# Altium PCB MI_06_07_08_MCU_Rev_4_0.PcbDoc
Units mm, origin at the board's own origin, x right, y up, seen from the top; angles counter-clockwise.
Board outline 79 x 66.2 mm, 2 copper layers (Top Layer, Bottom Layer), stack 1.671 mm thick; 93 components, 57 nets, 287 pads, 110 vias.
Unrouted connection lines stored in the file: 5.
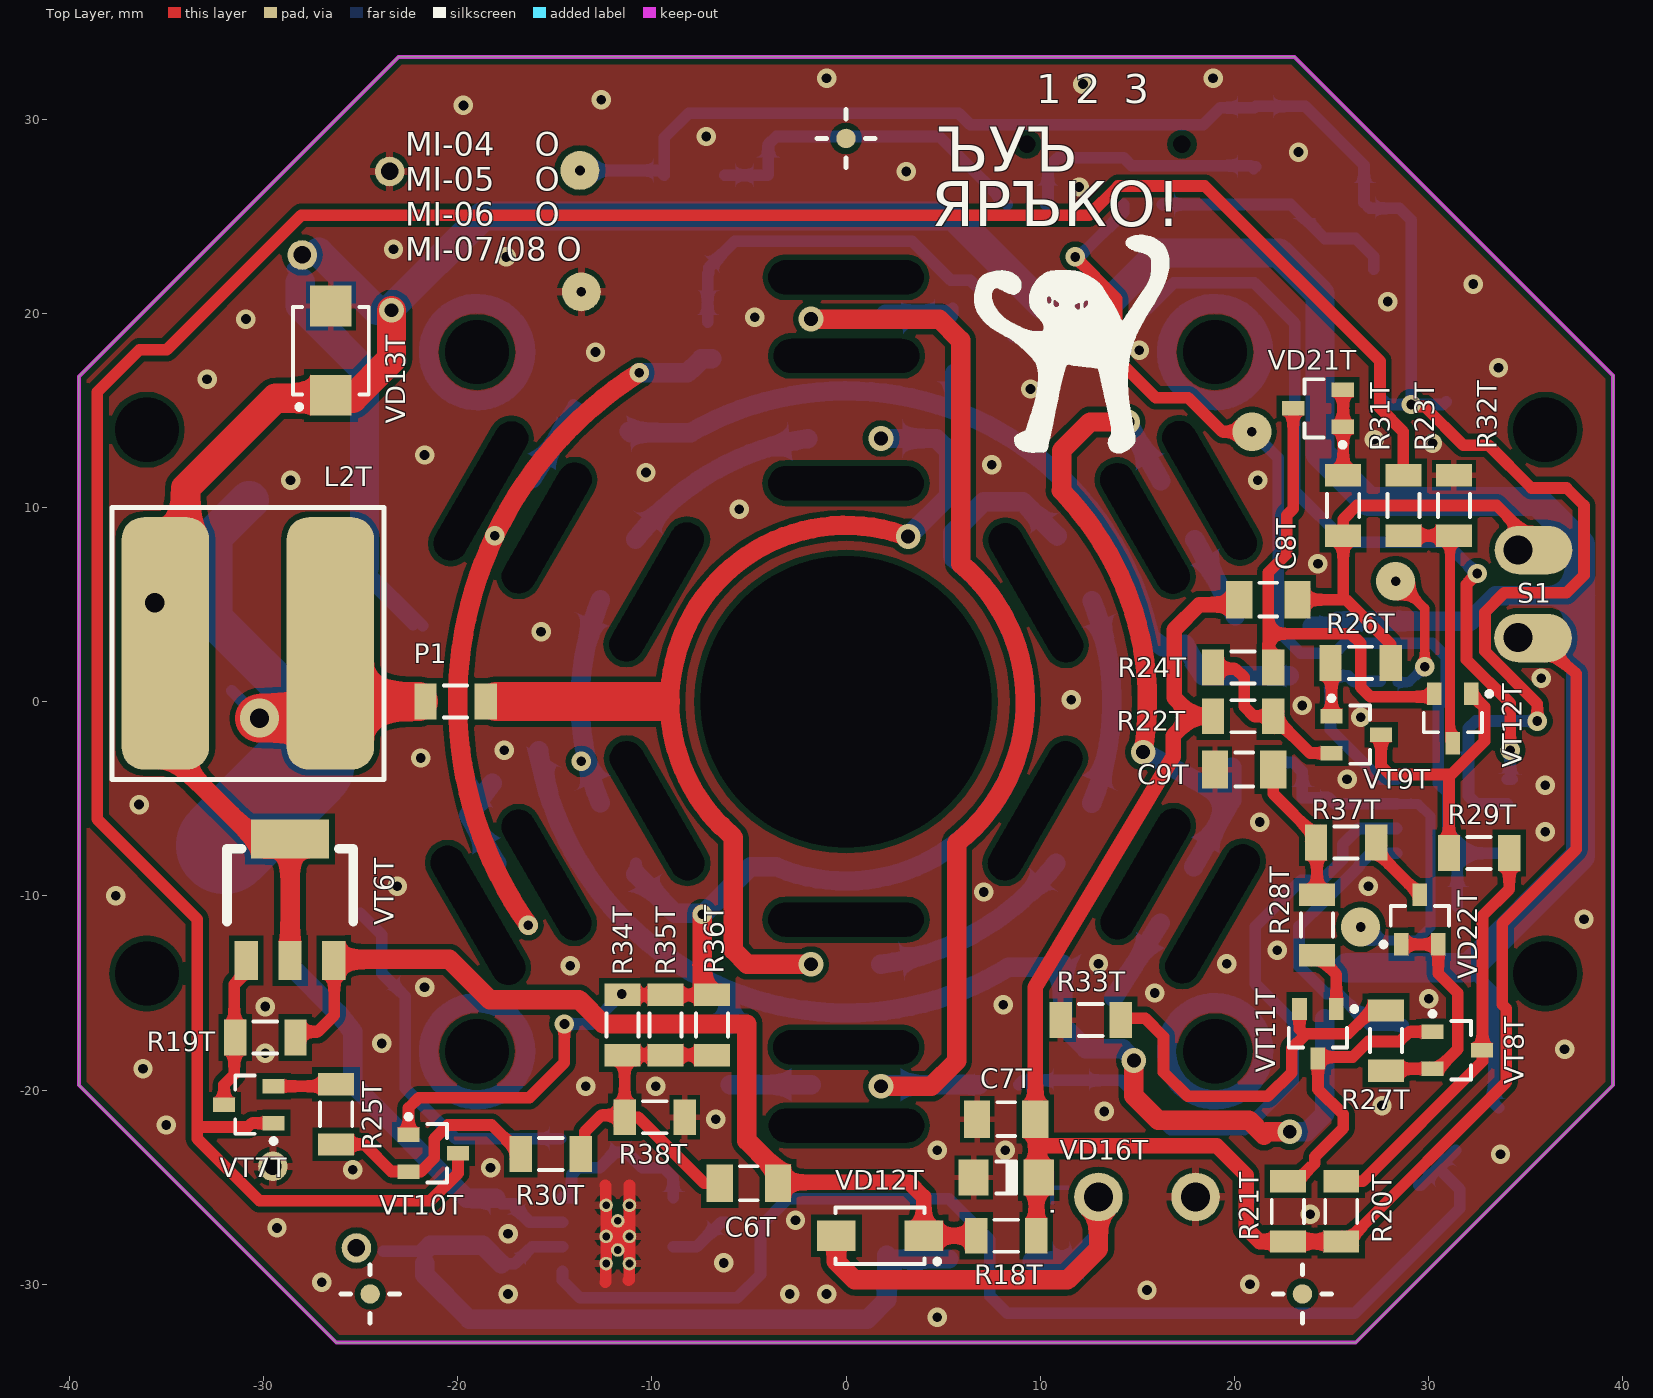
[diagram p0: Top Layer view]
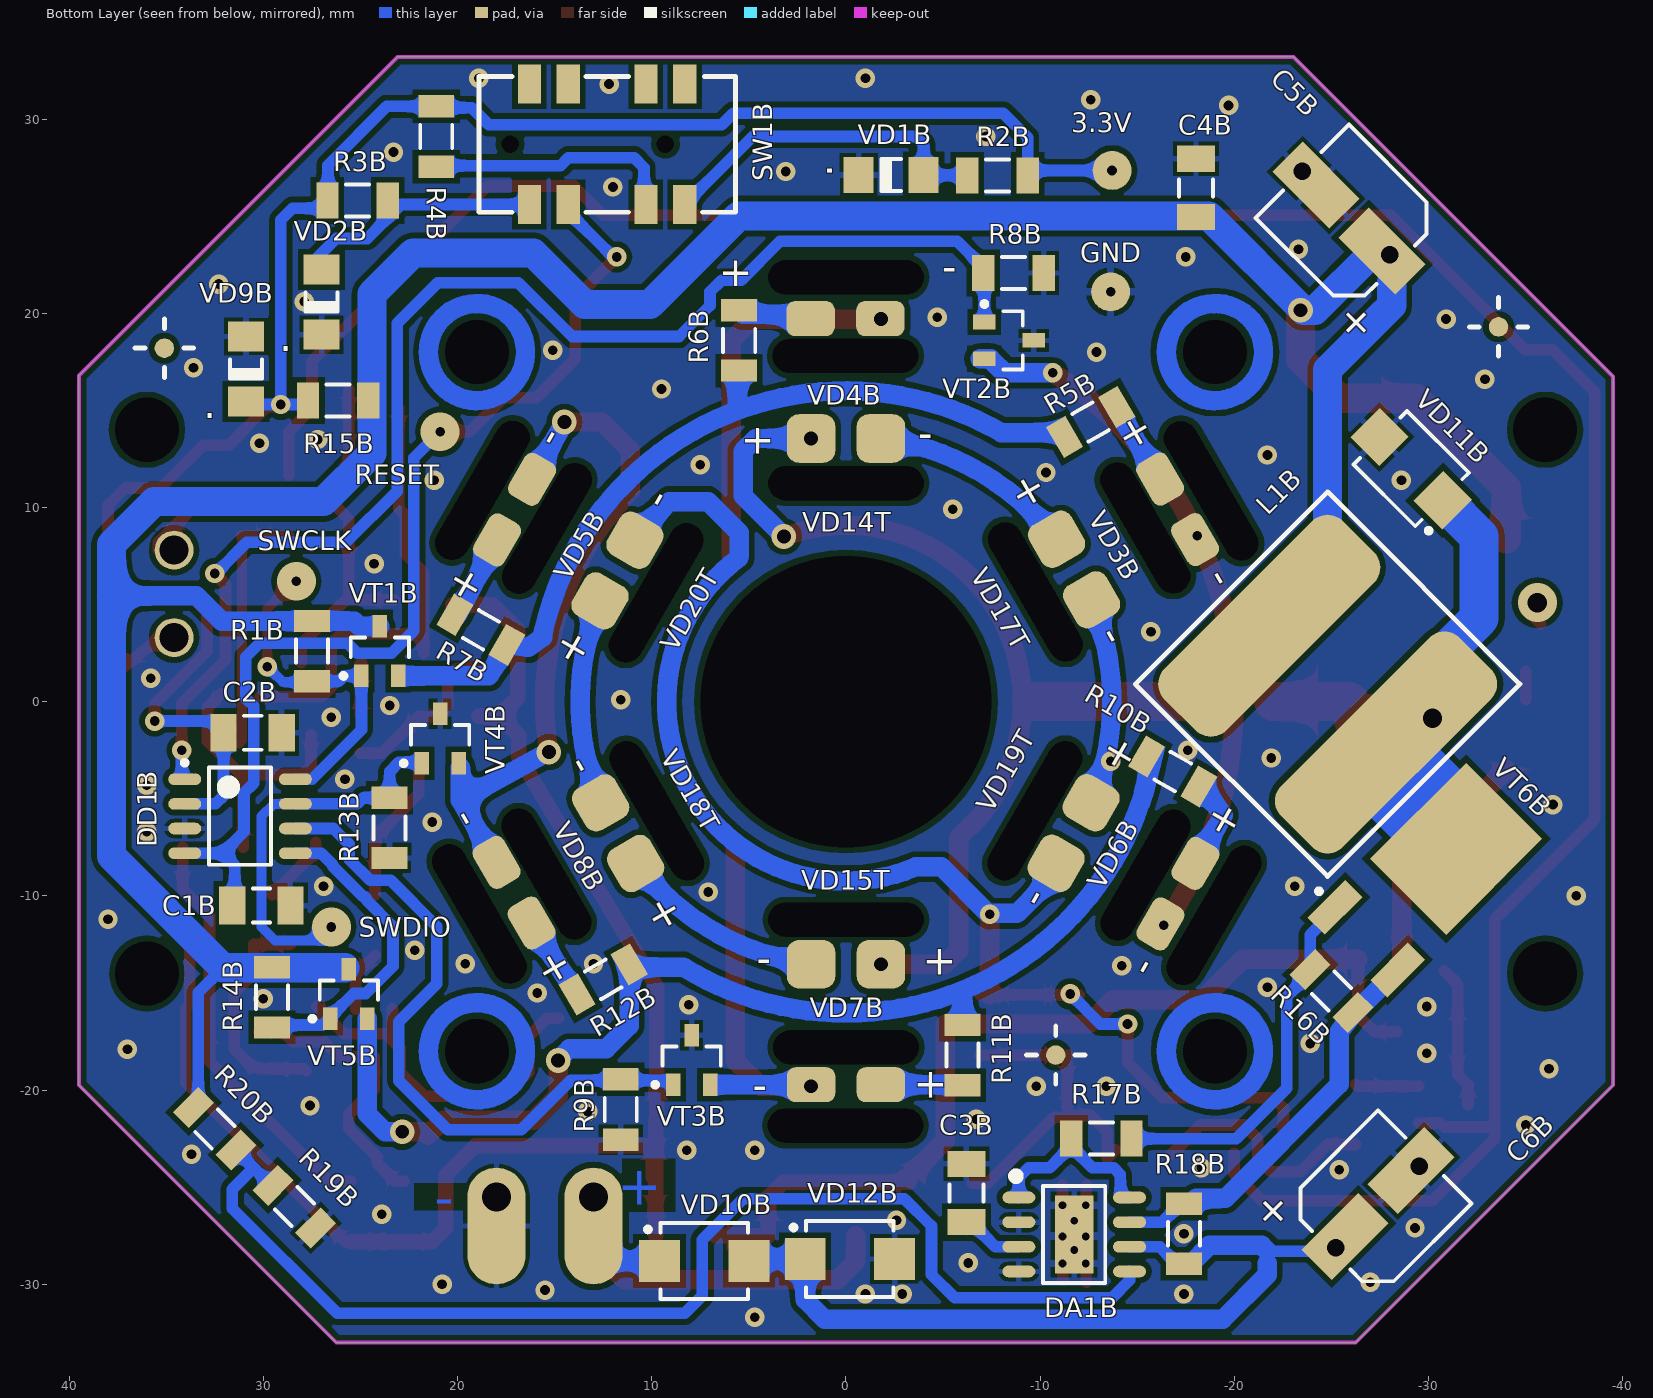
[diagram p1: Bottom Layer view, seen from below]
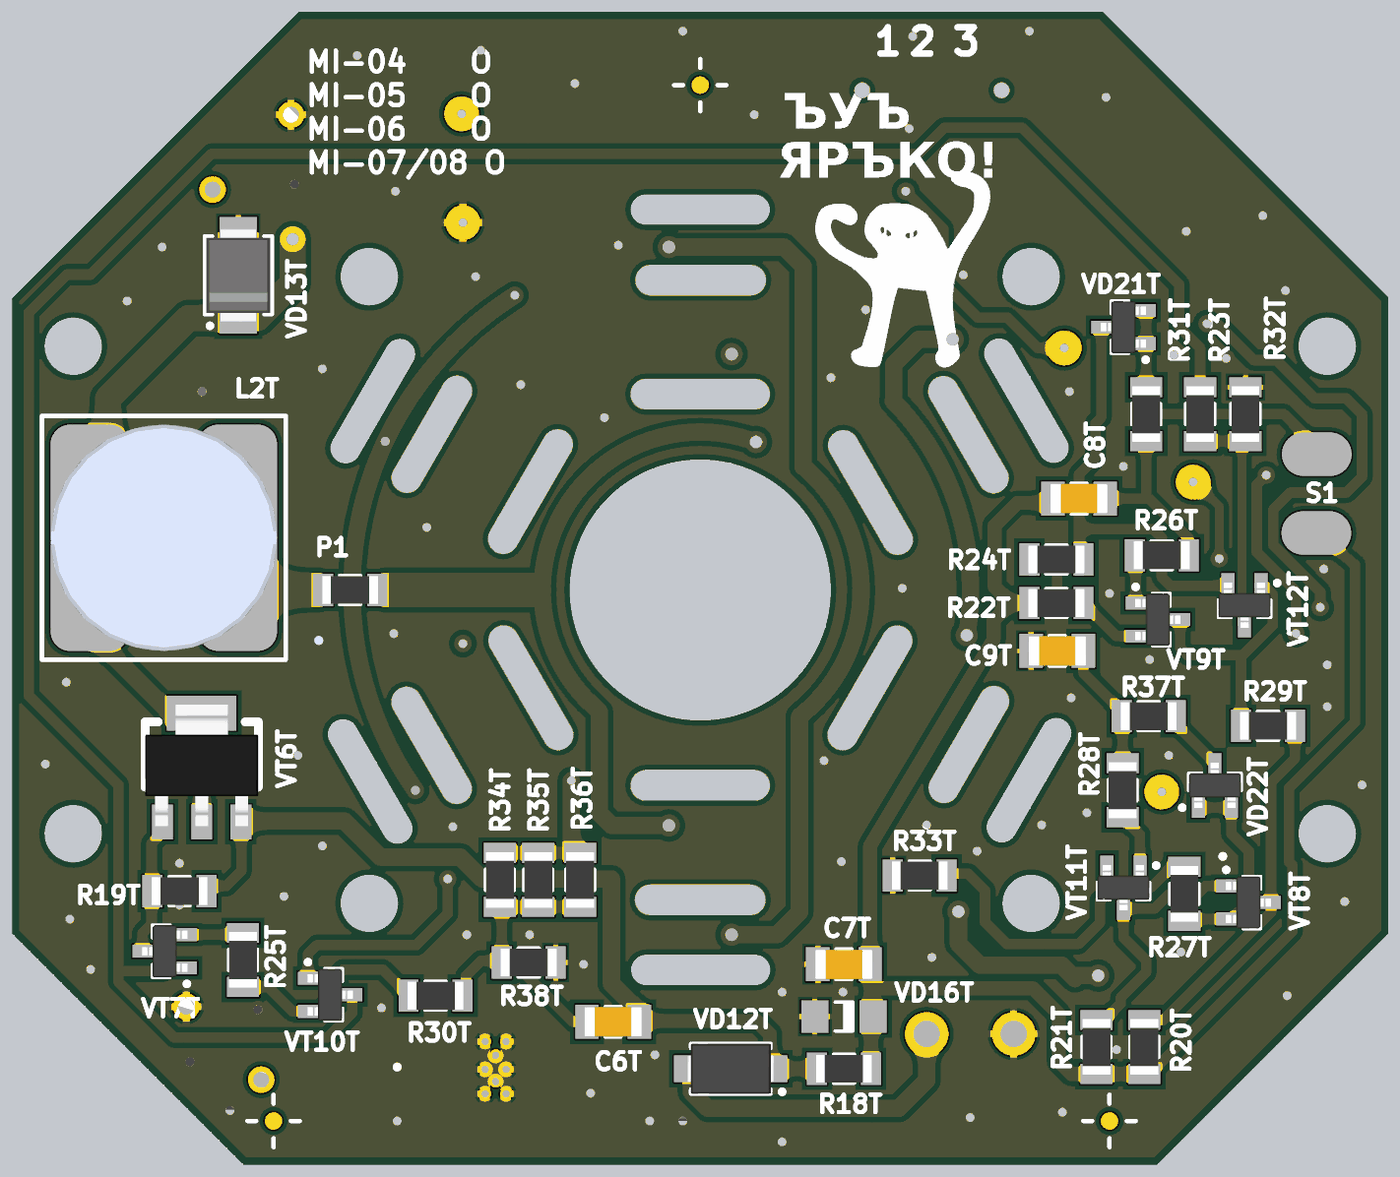
[diagram p2: 3D render of the assembled board from above, using the file's embedded part models]
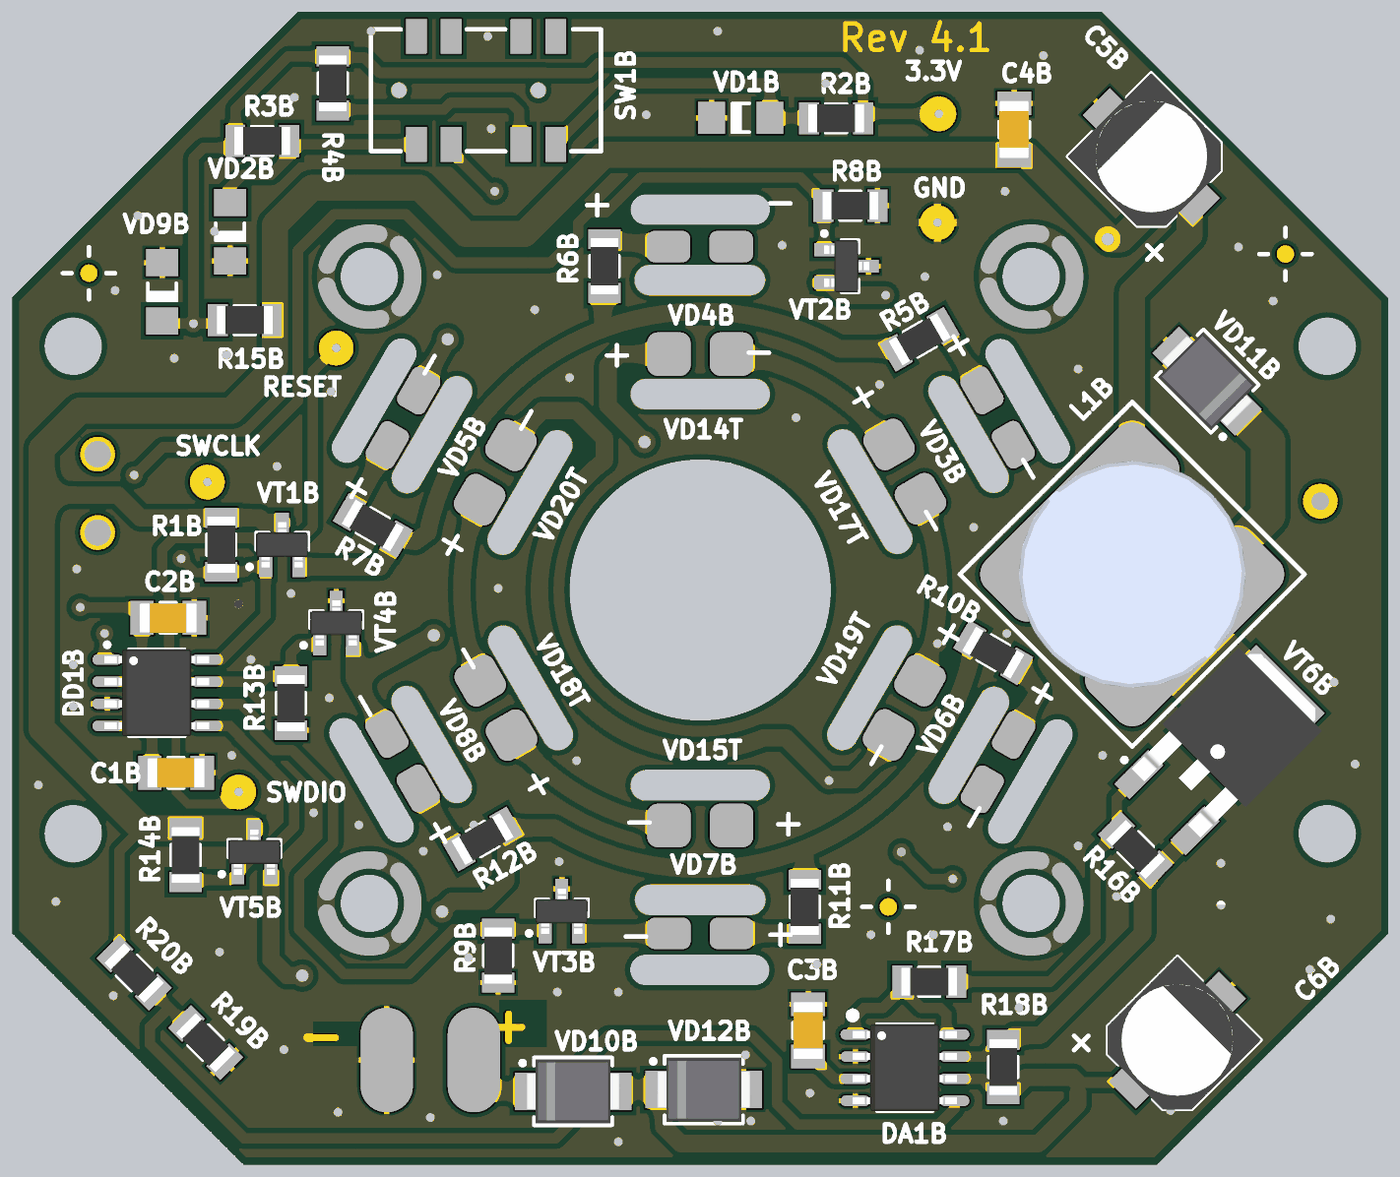
[diagram p3: 3D render of the assembled board from below, using the file's embedded part models]

## Layer stack, top to bottom
Top Solder: solder mask 0.0102, Solder Resist, Dk 3.5
Top Layer: signal copper 0.0356
Dielectric 1: dielectric 1.6, FR-4, Dk 4.8
Bottom Layer: signal copper 0.0356
Bottom Solder: solder mask 0.0102, Solder Resist, Dk 3.5

## Board outline
-39.5,-19.75 -39.5,16.75 -23.05,33.2 23.1,33.2 39.5,16.8 39.5,-19.75 26.25,-33 -26.25,-33

## Design rules (kind name [scope] priority, off if disabled: settings)
Clearance [All] p1: gap=0.254 ignorepadtopadclearanceinfootprint=FALSE except(0: Arc-Hole Track-Hole SMDPad-Hole THPad-Hole Via-Hole Fill-Hole Poly-Hole Region-Hole Text-Hole; 0.1: Arc-SMDPad Track-SMDPad SMDPad-SMDPad SMDPad-THPad SMDPad-Via SMDPad-Fill SMDPad-Region SMDPad-Text THPad-THPad THPad-Via THPad-Fill THPad-Region THPad-Text; 0.3: Arc-Poly Track-Poly SMDPad-Poly THPad-Poly Via-Poly Fill-Poly Poly-Poly Poly-Region Poly-Text)
ComponentClearance [All] p1: gap=-20 collisioncheckmode=3 verticalgap=0.254 showdistances=FALSE
PolygonConnect [All] p1: thpad.connectstyle=Relief thpad.reliefconductorwidth=0.4 thpad.reliefentries=4 thpad.polygonreliefangle="90 Angle" thpad.airgapwidth=0.254 smdpad.connectstyle=Relief smdpad.reliefconductorwidth=0.3 smdpad.reliefentries=4 smdpad.polygonreliefangle="90 Angle" smdpad.airgapwidth=0.2 via.connectstyle=Direct via.reliefconductorwidth=0.254 via.reliefentries=4 via.polygonreliefangle="90 Angle" via.airgapwidth=0.254
RoutingVias [All] p1: holewidth=0.711 width=1.27 viastyle="Through Hole" minholewidth=0.711 minwidth=1.27 maxholewidth=0.711 maxwidth=1.27
SolderMaskExpansion [All] p1: expansion=0.102
Width [All] p1: maxlimit=5 minlimit=0.3 preferedwidth=0.6
29 further rules are at their usual default settings.

## Classes and differential pairs
component class MI_04_05_Rev_2_0: C6T C7T C8T C9T L2T R18T R19T R20T R21T R22T R23T R24T R25T R26T R27T R28T R29T R30T R31T R32T R33T R34T R35T R36T R37T R38T VD12T VD13T VD14T VD15T VD16T VD17T VD18T VD19T VD20T VD21T VD22T VT6T VT7T VT8T VT9T VT10T VT11T VT12T
component class MI_06_07_08_MCU_Rev_3_0: C1B C2B C3B C4B C5B C6B DA1B DD1B DD1T L1B R1B R2B R3B R4B R5B R6B R7B R8B R9B R10B R11B R12B R13B R14B R15B R16B R17B R18B R19B R20B SW1B SW1T VD1B VD2B VD3B VD4B VD5B VD6B VD7B VD8B VD9B VD9T VD10B VD11B VD12B VT1B VT2B VT3B VT4B VT5B VT6B

## Components (designator, comment, footprint, x,y, rotation, side; value= is the part's Value field where it differs from the comment)
C1B "Capacitor" CAP1206 30.1,-10.5 r180 bottom value="0.1 uF"
C2B "Capacitor" CAP1206 30.55,-1.6 r0 bottom value="0.1 uF"
C3B "Capacitor" CAP1206 -6.2,-25.3 r90 bottom value="0.01 uF"
C4B "Capacitor" CAP1206 -18.025,26.45 r90 bottom value="0.1 uF"
C5B "Capacitor_Polar" CAP6.3x7.7 -25.9,24.9 r45 bottom value="470 uF 10V"
C6B "Capacitor_Polar" CAP6.3x7.7 -27.391,-25.848 r135 bottom value="100 uF 50V"
C6T "Capacitor" CAP1206 -5,-24.8 r0 top value="0.1 uF"
C7T "Capacitor" CAP1206 8.25,-21.5 r0 top value="0.22 uF"
C8T "Capacitor" CAP1206 21.75,5.25 r180 top value="0.22 uF"
C9T "Capacitor" CAP1206 20.5,-3.5 r0 top value="2.2 uF"
DA1B "MC34063" SOIC-8-EPad -11.75,-27.435 r180 bottom
DD1B "STM32G030J6" SOIC-8 31.2,-5.9 r180 bottom
L1B "coil" SDR1307 -24.8,0.9 r225 bottom value=SDR1307-680KL
L2T "coil" SDR1307 -30.8,3 r180 top value=SDR1307-101KL
P1 "Comment" RES1206 -20.1,0 r0 top
R1B "Resistor" RES1206 27.5,2.6 r90 bottom value="10 kOm"
R2B "Resistor" RES1206 -7.8,27.1 r0 bottom value="10 kOm"
R3B "Resistor" RES1206 25.15,25.8 r180 bottom value="10 kOm"
R4B "Resistor" RES1206 21.1,29.1 r270 bottom value="10 kOm"
R5B "Resistor" RES1206 -12.6,14.4 r150 bottom value="5.1 Om"
R6B "Resistor" RES1206 5.5,18.6 r90 bottom value="5.1 Om"
R7B "Resistor" RES1206 18.8,3.7 r30 bottom value="5.1 Om"
R8B "Resistor" RES1206 -8.625,22.075 r180 bottom value="10 kOm"
R9B "Resistor" RES1206 11.6,-21 r270 bottom value="10 kOm"
R10B "Resistor" RES1206 -16.825,-3.6 r30 bottom value="5.1 Om"
R11B "Resistor" RES1206 -6,-18.2 r90 bottom value="5.1 Om"
R12B "Resistor" RES1206 12.5,-14.3 r150 bottom value="5.1 Om"
R13B "Resistor" RES1206 23.5,-6.5 r270 bottom value="10 kOm"
R14B "Resistor" RES1206 29.55,-15.225 r90 bottom value="10 kOm"
R15B "Resistor" RES1206 26.15,15.5 r180 bottom value="xxx kOm"
R16B "Resistor" RES1206 -25,-14.9 r45 bottom value="xxx kOm"
R17B "Resistor" RES1206 -13.15,-22.5 r0 bottom value="xxx kOm"
R18B "Resistor" RES1206 -17.4,-27.4 r270 bottom value="xxx kOm"
R18T "Resistor" RES1206 8.25,-27.5 r180 top value="1.8 kOm"
R19B "Resistor" RES1206 28.4,-26 r225 bottom value="xxx kOm"
R19T "Resistor" RES1206 -29.9,-17.3 r180 top value="120 Om"
R20B "Resistor" RES1206 32.5,-22 r45 bottom value="xxx kOm"
R20T "Resistor" RES1206 25.5,-26.25 r90 top value="47 kOm"
R21T "Resistor" RES1206 22.75,-26.25 r90 top value="180 kOm"
R22T "Resistor" RES1206 20.45,-0.75 r0 top value="10 kOm"
R23T "Resistor" RES1206 28.7,10.1 r90 top value="10 kOm"
R24T "Resistor" RES1206 20.45,1.75 r0 top value="5.1 kOm"
R25T "Resistor" RES1206 -26.25,-21.25 r90 top value="240 Om"
R26T "Resistor" RES1206 26.5,2 r0 top value="47 kOm"
R27T "Resistor" RES1206 27.8,-17.45 r90 top value="5.1 kOm"
R28T "Resistor" RES1206 24.25,-11.5 r90 top value="47 kOm"
R29T "Resistor" RES1206 32.6,-7.8 r0 top value="180 kOm"
R30T "Resistor" RES1206 -15.2,-23.3 r180 top value="10 Om"
R31T "Resistor" RES1206 25.6,10.1 r90 top value="180 kOm"
R32T "Resistor" RES1206 31.3,10.1 r90 top value="47 kOm"
R33T "Resistor" RES1206 12.6,-16.4 r180 top value="10 kOm"
R34T "Resistor" RES1206 -11.5,-16.65 r90 top value="3 Om"
R35T "Resistor" RES1206 -9.3,-16.65 r90 top value="3 Om"
R36T "Resistor" RES1206 -6.9,-16.65 r90 top value="3 Om"
R37T "Resistor" RES1206 25.75,-7.25 r0 top value="180 kOm"
R38T "Resistor" RES1206 -9.85,-21.4 r180 top value="1 Om"
SW1B "mks13c02" ? 12.3,28.7 r0 bottom value=K3-2346S-K1
VD1B "Zenner" minimelf -2.325,27.125 r180 bottom value="TZS4678-GS08 1.8V"
VD2B "Zenner" minimelf 27,20.575 r90 bottom value=BZV55-C2V4
VD3B "LED" LED_MAJAK2 -15.408,8.941 r60 bottom
VD4B "LED" LED_MAJAK2 0.025,17.8 r0 bottom
VD5B "LED" LED_MAJAK2 15.4,8.925 r300 bottom
VD6B "LED" LED_MAJAK2 -15.425,-8.925 r120 bottom
VD7B "LED" LED_MAJAK2 0,-17.8 r180 bottom
VD8B "LED" LED_MAJAK2 15.425,-8.875 r240 bottom
VD9B "Zenner" minimelf 30.9,17.125 r90 bottom value=BZV55-C3V3
VD10B "Diode" SMB1 7.3,-28.8 r180 bottom value=SS210
VD11B "Schottky" SMB1 -29.1,12 r45 bottom value=SS210
VD12B "Suppressor" SMB1 -0.2,-28.7 r180 bottom value=SMBJ40CA-TR
VD12T "Diode" SMA-F 1.75,-27.5 r180 top value=S1M
VD13T "Schottky" SMB1 -26.525,18.075 r90 top value=SS210
VD14T "LED" LED_MAJAK 0,11.25 r0 bottom
VD15T "LED" LED_MAJAK 0,-11.225 r180 bottom
VD16T "Zenner" minimelf 8.25,-24.5 r180 top value=BZV55-C12V
VD17T "LED" LED_MAJAK -9.75,5.65 r60 bottom
VD18T "LED" LED_MAJAK 9.743,-5.625 r240 bottom
VD19T "LED" LED_MAJAK -9.725,-5.615 r120 bottom
VD20T "LED" LED_MAJAK 9.775,5.6 r300 bottom
VD21T "Diode" "SOT 23" 24.3,15.1 r180 top value=BAT54C
VD22T "Diode" "SOT 23" 29.55,-11.225 r90 top value=BAT54C
VT1B "MOSFET-P" "SOT 23" 24,2.6 r90 bottom value=IRLML2244TRPBF
VT2B "MOSFET-N" "SOT 23" -8.4,18.6 r180 bottom value=IRLML6244TRPBF
VT3B "MOSFET-N" "SOT 23" 7.95,-18.45 r90 bottom value=IRLML6244TRPBF
VT4B "MOSFET-N" "SOT 23" 20.9,-1.9 r90 bottom value=IRLML6244TRPBF
VT5B "MOSFET-P" "SOT 23" 25.6,-15.05 r90 bottom value=IRLML2244TRPBF
VT6B "MOSFET-P" "D PAK" -29.8,-9.2 r135 bottom value=FR9024N
VT6T "PNP" SOT223 -28.525,-11.775 r0 top value=BCP53
VT7T "NPN" "SOT 23" -30.75,-20.75 r180 top value=MMBTA42
VT8T "NPN" "SOT 23" 31.475,-17.95 r0 top value=BC847C
VT9T "PNP" "SOT 23" 26.275,-1.7 r0 top value=BC857C
VT10T "NPN" "SOT 23" -21.25,-23.25 r0 top value=BC847C
VT11T "NPN" "SOT 23" 24.3,-17.1 r270 top value=BC847C
VT12T "PNP" "SOT 23" 31.25,-0.875 r270 top value=BC857C

## Footprints (in the part's own frame and the unit in brackets; to place one, negate y for a bottom-side part, rotate by r counter-clockwise, add the part's x,y. Pads: shape width x height; smd on the part's side, far side on the other; paste and mask are expansions set on the pad)
CAP6.3x7.7 [mm]
  rect 4.15x2.2 smd: 1(-2.4,0) 2(2.4,0)
  silkscreen extent -3.4,-3.4 3.4,3.4, body extent -3.6,-3.4 3.6,3.4, height 7.7
CAP1206 [mm]
  rect 1.35x1.95 smd: 1(-1.5,0) 2(1.5,0)
  silkscreen extent -0.45,-0.87 0.45,0.87, body extent -1.65,-0.85 1.65,0.85, height 1.5
"D PAK" [mm]
  rect 2.75x1.25 smd: 1(-4.25,2.28) 3(-4.25,-2.28)
  rect 7x5.55 smd: 2(2.286,0)
  silkscreen extent -4.37,3.33 -4.13,3.58, body extent -4.31,-3.38 5.61,3.37, height 2.4
LED_MAJAK [mm]
  round 0 hole 1.75 slot 8 at 0 deg: 0(0,0)
  rrect50% 2.5x2.5 smd: 1(-1.8,-2.3) 2(1.8,-2.3)
LED_MAJAK2 [mm]
  round 0 hole 1.75 slot 7.5 at 0 deg: 0(0,0)
  rrect50% 2.5x1.8 smd: 1(-1.8,-1.925) 2(1.8,-1.925)
minimelf [mm] "MELF Diode, 2-Leads, Body 3,50x1,65mm, IPC Medium Density"
  rect 1.55x1.85 smd: 1(-1.675,0) 2(1.675,0)
  silkscreen extent -0.5,-0.83 0.5,0.83, body extent -1.85,-0.85 1.85,0.85, height 1.69
RES1206 [mm] "Chip Resistor, 2-Leads, Body 3,20x1,60mm, IPC Medium Density"
  rect 1.15x1.85 smd: 1(-1.55,0) 2(1.55,0)
  silkscreen extent -0.6,-0.82 0.6,0.82, body extent -1.6,-0.8 1.6,0.8, height 0.6
SDR1307 [mm]
  rrect50% 4.5x13 smd: 1(4.25,0) 2(-4.25,0)
  silkscreen extent -7,-7 7,7, body extent -6.5,-6.5 6.5,6.5, height 7
SMA-F [mm] "Molded Diode, 2-Leads, Body 4,30x2,70mm, IPC Medium Density"
  rect 2x1.55 smd: 1(-2.25,0) 2(2.25,0)
  silkscreen extent -3.08,-1.45 2.3,1.45, body extent -2.52,-1.45 2.52,1.45, height 2.4
SMB1 [mm] "Molded Diode, 2-Leads, Body 4,25x3,60mm, IPC Medium Density"
  rect 2.1x2.15 smd: 1(-2.3,0) 2(2.3,0)
  silkscreen extent -3.03,-1.95 2.25,1.95, body extent -2.7,-1.8 2.7,1.8, height 2.3
SOIC-8 [mm] "SOIC, 8-Leads, Body 4,90x3,90mm, Pitch 1,27mm, IPC Medium Density"
  oval 1.7x0.6 smd: 1(-2.85,1.905) 2(-2.85,0.635) 3(-2.85,-0.635) 4(-2.85,-1.905) 5(2.85,-1.905) 6(2.85,-0.635) 7(2.85,0.635) 8(2.85,1.905)
  silkscreen extent -2.98,-2.5 1.6,2.88, body extent -3,-2.5 3,2.5, height 1.75
SOIC-8-EPad [mm] "SOIC, 8-Leads, Body 4,90x3,90mm, Pitch 1,27mm, IPC Medium Density"
  round 0.7 hole 0.4: 0(-0.6,1.5) 0(-0.6,-0.1) 0(-0.6,-1.5) 0(0,-0.8) 0(0,0.7) 0(0.6,-1.5) 0(0.6,1.5) 0(0.6,-0.1)
  rect 2x4 smd: 0(0,0)
  oval 1.7x0.6 smd: 1(-2.85,1.905) 2(-2.85,0.635) 3(-2.85,-0.635) 4(-2.85,-1.905) 5(2.85,-1.905) 6(2.85,-0.635) 7(2.85,0.635) 8(2.85,1.905)
  silkscreen extent -3.2,-2.5 1.6,3.2, body extent -3,-2.5 3,2.5, height 1.75
SOT223 [mm]
  rect 1.2x2 smd: 1(-2.35,-1.55) 2(-0.1,-1.55) 3(2.15,-1.55)
  rect 4x2 smd: 2(-0.1,4.7)
  silkscreen extent -3.35,0.45 3.15,4.2, body extent -3.35,-1.78 3.15,5.18, height 1.7
"SOT 23" [mm] "SOT23, 3-Leads, Body 2,90x2,45mm, Pitch 0,95mm, IPC Medium Density"
  rect 1.15x0.75 smd: 1(-1.275,0.95) 2(-1.275,-0.95) 3(1.275,0)
  silkscreen extent -1.4,-1.5 0.7,2, body extent -1.3,-1.5 1.3,1.5, height 1.1
? [mm]
  round 0 hole 0.9: 0(-3,0) 0(5,0)
  rect 1.2x2 smd: 1(-4,-3.1) 1(-4,3.1) 2(-2,-3.1) 2(-2,3.1) 3(2,-3.1) 3(2,3.1) 4(4,-3.1) 4(4,3.1)
  silkscreen extent -6.6,-3.5 6.6,3.5, body extent -6.5,-3.45 6.5,3.45, height 3.5

## Free pads (board coordinates)
  round 0 / inner round 3.3 / far side round 0 hole 3.3 unplated mask-25.4: 0(-36,-14) 0(-36,14) 0(-19,-18) 0(-19,18) 0(19,-18) 0(19,18) 0(36,-14) 0(36,14)
  round 0 hole 1.75 slot 8 at 120 deg unplated mask-25.4: 0(-18.95,-11) 0(18.725,10.875)
  round 0 hole 1.75 slot 8 at 60 deg unplated mask-25.4: 0(-18.8,10.85) 0(18.875,-10.925)
  round 0 hole 15 unplated: 0(0,0)
  round 0 hole 1.75 slot 8 at 0 deg unplated mask-25.4: 0(0,21.85) 0(0.025,-21.825)
  round 0.025 on Mech13: 1(189.769,192.414) 1(189.769,192.414) 1(189.769,192.414) 1(191.513,192.692) 1(191.513,192.692) 1(191.513,192.692) 1(191.547,192.414) 1(191.547,192.414) 1(191.547,192.414)
  oval 3x6 smd far side: 2(13,-27) 2(18,-27)
  oval 4x2.5 smd: 2(35.375,3.275) 3(35.4,7.8)
  round 2.5 hole 1.5: 6(13,-25.5) 7(18,-25.5)
  round 2 hole 1.5: 8(34.6,3.3) 9(34.6,7.8)
  round 2 hole 0.5: 10(-13.7,27.35) 10(-13.625,21.1)
  round 1 smd far side paste-3: 11(-33.6,19.3) 11(-10.8,-18.2) 11(35.1,18.2)
  round 1 smd paste-3: 11(-24.5,-30.5) 11(0,29) 11(23.5,-30.5)
  round 1.524 hole 0.9: 12(-23.5,27.3) 13(-29.508,-23.931) 13(-28,23) 13(-25.208,-28.131)

## Via types
v1: diameter 1, hole 0.5, Top Layer to Bottom Layer, tented both sides, 95 vias
v2: diameter 1.27, hole 0.711, Top Layer to Bottom Layer, tented both sides, 9 vias
v3: diameter 2, hole 0.5, Top Layer to Bottom Layer, 3 vias
v4: diameter 2, hole 1, Top Layer to Bottom Layer, 2 vias
v5: diameter 1.27, hole 0.711, Top Layer to Bottom Layer, 1 vias

## Nets (pads, with @x,y where several pads share a name; then routed paths per layer and width w, separated by ;. In a path a pad name is that pad's centre, name@x,y a point inside that pad or via, vN(x,y) a via of type N, cw(c..) or ccw(c..) an arc to the next point about the centre after c; other vN are vias at no path point)
3.3V: C2B.2 DD1B.2 pad.10@-13.7,27.35 R2B.1 R3B.1 R4B.1 R15B.1 VD9B.1 | length 98.6
  Top Layer w0.6: v1@29.45,15.2 29.791,15.2 31.791,13.2 33.1,13.2 35.3,11 37.1,11 38,10.1 38,6.5 37.1,5.6 33.9,5.6 32.9,4.6 32.9,2.6 35.6,-0.1 v1(35.6,-1)
  Bottom Layer w0.6: pad.10@-13.7,27.35 -9.6,27.35 R2B.1 -9.35,29.05 -8.1,30.3 5.8,30.3 6.4,29.7 8.88,29.7 8.884,29.704 18.396,29.704 19.275,30.583 21.033,30.583 R4B.1 23.65,30.65 26.675,27.625 26.675,25.7 26.975,25.4 28.5,25.4 29.1,24.8 v1(29.1,15.3) ; R15B.1 27.9,15.3 v1(29.1,15.3) ; VD9B.1 30.75,15.3 v1(29.1,15.3) ; DD1B.2 32.465,-5.265 32.05,-4.85 C2B.2 32.05,-1.375 32.425,-1 v1(35.6,-1)
4V: C4B.1 C5B.1 L1B.2 L2T.1 pad.13@-28,23 R1B.2 R14B.2 R15B.2 R20B.2 VD13T.1 VT1B.3 VT5B.3 VT6T.2 | length 194.4
  Top Layer w0.6: L2T.1@-35.775,4 L2T.1@-35,4.775 ; L2T.1@-35,0.1 L2T.1@-35,1.55
  Top Layer w1: -34,-3.5 -29.9,-7.6 -28.625,-7.6 VT6T.2@-28.625,-13.675
  Top Layer w1.5: L2T.1@-34,8.375 -34,11 -29.375,15.625 -25.4,15.625 -23.4,17.625 v5(-23.4,20.15)
  Bottom Layer w0.6: C5B.1@-28.198,21.998 -28.5,22.3 pad.13@-28.198,22.602 ; L1B.2@-24.975,6.639 L1B.2@-22.293,3.957 ; L1B.2@-24.8,6.91 L1B.2 ; -9.5,25.004 -9.35,25.154 ; 32.075,-13.7 33.349,-14.974 33.349,-20.656 R20B.2 ; 37.8,-1.6 37.825,-1.575
  Bottom Layer w1: VT1B.3 25.05,3.875 25.325,4.15 R1B.2 32.148,4.15 33.448,5.45 37.825,5.45
  Bottom Layer w1.5: C5B.1@-28.1,21.598 -28.1,20.4 -27.45,19.75 -24.8,17.1 L1B.2@-24.8,6.91 ; C5B.1@-27.147,23.147 -24.15,20.15 -23.55,20.15 -18.696,25.004 -9.5,25.004 5.54,25.004 10.094,20.45 13.45,20.45 16.1,23.1 22.3,23.1 24.412,20.988 24.412,12.788 26.9,10.3 35.625,10.3 37.825,8.1 37.825,5.45 37.825,-1.575 37.825,-7.95 32.075,-13.7 VT5B.3@25.8,-13.7
  other v4: -35.6,5.1
12V: pad.2@13,-27 pad.6 VD10B.1 VD12T.2 | length 23
  Top Layer w1: VD12T.2 -0.5,-28.825 0.45,-29.775 11.4,-29.775 13,-28.175 pad.6
  Bottom Layer w1: VD10B.1 11.791,-28.8 13,-27.591 pad.2@13,-27
GND: C1B.2 C2B.1 C3B.2 C4B.2 C5B.2 C6B.2 C7T.1 C9T.1 DA1B.0 DA1B.2 DA1B.4 DD1B.3 pad.2@18,-27 pad.7 pad.10@-13.625,21.1 pad.12 pad.13@-29.508,-23.931 R8B.2 R9B.2 R13B.2 R19B.2 R32T.2 R33T.2 R38T.1 VD1B.1 VD2B.1 VD9B.2 VD11B.2 VD12B.2 VD13T.2 VD16T.2 VT2B.3 VT3B.3 VT4B.3 | length 12.1
  Top Layer w0.6: -12.4,-29.9 -12.369,-29.869 -12.369,-28.954 -12.35,-28.935 -12.35,-27.535 -12.35,-25.935 -12.369,-25.916 -12.369,-24.931 -12.4,-24.9 ; DA1B.0@-11.75,-28.235 -11.75,-27.535 ; DA1B.0@-11.75,-26.735 -11.75,-27.535 ; -11.2,-29.8 -11.169,-29.769 -11.169,-28.954 -11.15,-28.935 DA1B.0@-11.15,-27.535 ; -11.15,-24.9 -11.15,-25.935 DA1B.0@-11.15,-27.535 ; -11.75,-27.535 DA1B.0@-11.15,-27.535
  other v1: 4.7,-31.7 -17.4,-30.5 -2.9,-30.5 -1,-30.5 15.5,-30.3 20.8,-30 -27,-29.9 -6.3,-28.9 -17.4,-27.4 -29.3,-27.1 -2.6,-26.7 23.9,-26.4 -25.4,-24.1 -18.3,-24 33.7,-23.3 4.7,-23.1 8.2,-23.1 -35,-21.8 -6.7,-21.5 13.3,-21.1 27.6,-20.8 -13.4,-19.8 -9.8,-19.8 -36.2,-18.9 -29.9,-18.1 37,-17.9 -23.9,-17.6 -29.9,-15.7 8.1,-15.6 30,-15.3 15.9,-15 -21.7,-14.7 -14.2,-13.6 13,-13.5 19.6,-13.5 22.2,-12.8 38,-11.2 -37.6,-10 7.1,-9.8 -23.1,-9.5 26.9,-9.5 36,-6.7 21.3,-6.2 -36.4,-5.3 36,-4.3 25.8,-4 -21.9,-2.9 -17.6,-2.5 26.5,-0.8 23.5,-0.2 11.6,0.1 35.8,1.2 -15.7,3.6 24.3,7.1 -5.5,9.9 -28.6,11.4 21.2,11.4 -10.3,11.8 7.5,12.2 -21.7,12.7 30.2,13.3 27.2,13.5 9.5,16.1 -32.9,16.6 33.6,17.2 -12.9,18 15.1,18.1 -30.9,19.7 -4.7,19.8 27.9,20.6 32.3,21.5 -17.5,22.9 -23.3,23.3 12,26.5 3.1,27.3 23.3,28.3 -7.2,29.1 -19.7,30.7 -12.6,31 12.2,31.8 -1,32.1 18.9,32.1
NetC1B_1: C1B.1 DD1B.4 SW1B.3 | length 54.8
  Top Layer w0.6: v1(11.8,22.9) 13.95,20.75 13.95,17.65 15.95,15.65 17.625,15.65 19.375,13.9 v3(20.9,13.9)
  Bottom Layer w0.6: v1(11.8,22.9) 11.877,22.977 12.077,22.977 14.3,25.2 SW1B.3@14.3,25.6 ; v3(20.9,13.9) 22.254,12.546 22.254,3.646 23.4,2.5 25.166,2.5 25.666,3 30.2,3 30.9,2.3 30.9,0.175 30.5,-0.225 30.5,-4.2 31,-4.7 31,-6.705 32.1,-7.805 ; C1B.1@31.475,-10.55 31.475,-8.43 32.1,-7.805 ; DD1B.4 32.1,-7.805
NetC3B_1: C3B.1 DA1B.3 | length 3.2
  Bottom Layer w0.6: DA1B.3 -7.695,-28.07 -6.425,-26.8 C3B.1
NetC6B_1: C6B.1 DA1B.6 pad.13@-25.208,-28.131 R18B.2 VD10B.2 VD12B.1 | length 42
  Bottom Layer w0.6: C6B.1@-23.826,-28.293 -21.693,-28.293 ; R18B.2@-17.75,-28.95 R18B.2 -17.05,-28.95 -16.17,-28.07 DA1B.6 ; VD12B.1 2.2,-28.7 VD12B.1@2.1,-28.6
  Bottom Layer w1: -21.693,-28.293 -21.4,-28 -18.7,-28 R18B.2@-17.75,-28.95 ; -21.683,-28.917 -21.683,-29.517 -19.4,-31.8 1.1,-31.8 2.1,-30.8 VD12B.1 ; VD12B.1@2.1,-28.5 2.2,-28.6 VD12B.1@2.3,-28.7 ; VD12B.1@2.2,-28.7 VD12B.1@2.3,-28.7 ; VD12B.1@2.418,-29.062 2.324,-28.805 2.35,-28.75 VD12B.1@2.3,-28.7 ; VD10B.2@5.3,-28.7 VD12B.1@2.3,-28.7
NetC6T_1: C6T.1 R30T.1 R34T.1 R35T.1 R36T.1 R38T.2 | length 17.4
  Top Layer w0.6: R30T.1@-13.875,-23.075 R30T.1 -13.45,-23.5 -13.45,-22.15 -12.6,-21.3 R38T.2@-11.7,-21.3 ; R34T.1 R35T.1 R36T.1 ; R38T.2 -10.7,-21.4 -7.3,-24.8 C6T.1 ; R38T.2@-11.4,-20.9 R34T.1@-11.4,-18.5
NetC6T_2: C6T.2 R18T.2 R19T.1 VD12T.1 VT6T.3 | length 48.8
  Top Layer w0.6: R19T.1@-28.35,-17 -27.2,-17 -26.35,-16.15 VT6T.3@-26.35,-13.275
  Top Layer w0.8: C6T.2@-3.25,-24.75 3.25,-24.75 4,-25.5 VD12T.1 R18T.2
  Top Layer w1: VT6T.3@-26.35,-13.275 -20.425,-13.275 -18.354,-15.346 -13.754,-15.346 -12.5,-16.6 -5.1,-16.6 -5.1,-22.6 C6T.2@-3.2,-24.5
NetC7T_2: C7T.2 C8T.2 pad.2@35.375,3.275 pad.8 R18T.1 R20T.1 R21T.1 R22T.1 VD16T.1 | length 97.2
  Top Layer w0.6: R20T.1 25.8,-27.8 34,-19.6 34,-15.8 33.796,-15.596 33.796,-11.404 37.6,-7.6 37.6,1.44 pad.2@35.375,3.275
  Top Layer w0.8: R18T.1 9.8,-21.55 C7T.2 9.75,-14.7 16.847,-2.829 16.847,-1.753 17.85,-0.75 ; VD16T.1 9.925,-22.875 19.1,-22.875 20.6,-24.375 20.6,-27.1 21.3,-27.8 R21T.1 R20T.1 ; R22T.1 17.85,-0.75 ; C8T.2@20.25,5 18.2,5 16.9,3.7 16.9,0.2 17.85,-0.75
NetC8T_1: C8T.1 pad.3 pad.9 R26T.2 R31T.1 | length 22.2
  Top Layer w0.6: C8T.1 25.5,5.25 ; R26T.2 28.05,2.95 25.75,5.25 25.5,5.25 ; pad.3 35.4,8.2 33.5,10.1 26.3,10.1 25.6,9.4 R31T.1 25.6,5.35 25.5,5.25
NetC9T_2: C9T.2 R28T.2 R37T.1 | length 7.4
  Top Layer w0.6: C9T.2 22,-4.75 24.2,-6.95 R37T.1 24.25,-7.3 R28T.2
NetDA1B_1: DA1B.1 DA1B.8 R17B.2 | length 8.9
  Bottom Layer w0.6: DA1B.8 -14.13,-25.53 -14.13,-24.351 -13.779,-24 -12.684,-24 -11.884,-23.2 -11.295,-23.2 -10.495,-24 -9.4,-24 -8.9,-24.5 DA1B.1
NetDA1B_5: DA1B.5 R19B.1 R20B.1 | length 62.2
  Bottom Layer w0.6: DA1B.5 -14.6,-29.8 -13.7,-30.7 -5.6,-30.7 -4.4,-29.5 -4.4,-27 -3,-25.6 5.3,-25.6 7.4,-27.7 7.4,-30.6 8.3,-31.5 26.2,-31.5 31.6,-26.1 31.6,-25.1 30.5,-24 ; R19B.1 29.596,-24.904 30.5,-24 ; R20B.1 30.5,-24
NetDA1B_7: DA1B.7 R16B.1 R18B.1 VT6B.3 | length 21.3
  Bottom Layer w0.6: R18B.1@-18.025,-25.575 -17.75,-25.85 R18B.1 -17.05,-25.85 -17.05,-26.05 -16.3,-26.8 DA1B.7
  Bottom Layer w1: VT6B.3@-28.65,-13.55 -26.15,-16.05 -25.4,-17 -25.4,-19.7 -19.525,-25.575 R18B.1@-18.025,-25.575
NetDD1B_1: DD1B.1 R8B.1 VT2B.1 | length 69.9
  Top Layer w0.6: v1(32.5,6.6) 31.95,6.05 31.95,2.166 34.2,-0.084 v1(34.2,-2.5)
  Bottom Layer w0.6: VT2B.1 -7.125,22.025 R8B.1 -7.075,22.35 -5.725,23.7 3.4,23.7 5.4,21.7 6.4,21.7 7,21.1 7,20.4 8.6,18.8 14.1,18.8 16.875,21.575 21.025,21.575 23.108,19.492 23.108,10.842 25.75,8.2 30.85,8.2 32.45,6.6 v1(32.5,6.6) ; DD1B.1 34.295,-3.995 34.2,-3.9 v1(34.2,-2.5)
NetDD1B_5: DD1B.5 R14B.1 VT5B.1 | length 15.4
  Bottom Layer w0.6: DD1B.5 27.02,-7.805 26.429,-8.396 26.429,-8.479 24.854,-10.054 24.771,-10.054 24.696,-10.129 24.696,-10.204 23.325,-11.575 23.325,-13.625 24.729,-15.029 25.354,-15.029 26.975,-16.65 R14B.1@28.7,-16.65
NetDD1B_6: DD1B.6 R9B.1 VT3B.1 | length 34.9
  Bottom Layer w0.6: VT3B.1 9.125,-19.5 14.169,-19.5 16.719,-22.05 20.5,-22.05 23.025,-19.525 23.025,-16.475 21.075,-14.525 21.075,-11.575 23.45,-9.2 24.5,-9.2 25.575,-8.125 25.575,-7.35 26.39,-6.535 DD1B.6
NetDD1B_7: DD1B.7 R13B.1 VT4B.1 | length 20.3
  Bottom Layer w0.5: v3@26.4,-11.6 27.1,-12.3 29.4,-12.3 30.1,-11.6 30.1,-5.9 29.465,-5.265 DD1B.7
  Bottom Layer w0.6: VT4B.1@21.775,-3.125 23.025,-3.125 23.5,-3.6 R13B.1 24.85,-4.95 25.165,-5.265 DD1B.7 ; v3@26.4,-11.6 v3(26.5,-11.6)
NetDD1B_8: DD1B.8 R1B.1 VT1B.1 | length 16.5
  Top Layer w0.5: v3@28.5,6.1 29.8,4.8 v1(29.8,1.8)
  Bottom Layer w0.5: R1B.1@28.4,1 29,1 v1(29.8,1.8)
  Bottom Layer w0.6: R1B.1 26.125,1.05 25.85,1.325 VT1B.1 24.95,-1.45 27.495,-3.995 DD1B.8
  other v3: 28.3,6.2
NetL1B_1: L1B.1 L2T.2 P1.1 P1.2 VD11B.1 VD14T.2 VD15T.2 VT6B.2 | length 88.1
  Top Layer w0.6: L2T.2@-26.35,-0.85 -26,-0.5 -26,-0.075 L2T.2@-25.925,0
  Top Layer w1: -6.418,-6.418 cw(c0,0) -9.076,0 cw(c0,0) v2@2.9,8.6 ; -6.4,-6.4 -5.8,-7 -5.8,-12.8 -5.075,-13.525 v2(-1.8,-13.525)
  Top Layer w2: L2T.2@-25.925,0 P1.1@-22,0 ; P1.2@-18,0 -9.55,0
  Top Layer w2.5: v4(-30.2,-0.85) L2T.2@-26.35,-0.85
  Bottom Layer w0.6: L1B.1@-31.625,0.561 -30.207,-0.857 L1B.1@-28.657,-2.407 ; L1B.1@-27.805,-3.205 L1B.1 L1B.1@-27.805,-0.495
  Bottom Layer w1: v2(1.8,13.55) 4.65,13.55 5.3,12.9 5.3,10.6 v2(3.2,8.5)
  Bottom Layer w2: VD11B.1@-30.709,10.356 -30.744,10.356 -32.6,8.5 -32.6,4.3 L1B.1@-27.805,-0.495
  Bottom Layer w5: VT6B.2@-32,-7.4 L1B.1@-27.805,-3.205
NetR2B_2: R2B.2 SW1B.1 VD1B.2 | length 17.8
  Bottom Layer w0.6: R2B.2 -4.025,27.1 VD1B.2 -4,28.7 -3.6,29.1 4.8,29.1 SW1B.1@8.3,25.6
NetR3B_2: R3B.2 SW1B.4 VD2B.2 | length 12.6
  Bottom Layer w0.6: SW1B.4@16.3,25.6 22.9,25.6 24.65,23.85 26.25,23.85 27.177,22.923 VD2B.2@27.177,22.27
NetR4B_2: R4B.2 SW1B.2 | length 13.1
  Bottom Layer w0.6: SW1B.2@10.3,25.6 10.4,25.7 10.4,27.5 10.9,28 14.3,28 14.7,27.6 20.85,27.6 21,27.45 R4B.2
NetR5B_1: R5B.1 R6B.1 R7B.1 VT1B.2 | length 43.5
  Bottom Layer w1: R5B.1@-11.158,13.925 -11.088,13.856 -8.001,13.856 cw(c0,0) 15.563,3.715 15.625,3.318 16.355,2.787 R7B.1@17.452,2.96 ; 5.6,15 R6B.1@5.6,16.9 ; R7B.1 18.391,1.325 VT1B.2@22.825,1.325
NetR5B_2: R5B.2 VD3B.2 | length 5
  Bottom Layer w0.6: VD3B.2 VD3B.2@-16.175,11.984 ; R5B.2@-14.042,15.275 -14.015,15.158 R5B.2@-13.975,14.983
  Bottom Layer w1: VD3B.2 R5B.2@-13.975,14.983
NetR6B_2: R6B.2 VD4B.2 | length 4
  Bottom Layer w0.6: VD4B.2 VD4B.2@2.037,19.937 ; R6B.2@5.287,19.937 R6B.2 ; R6B.2@5.375,20.125 R6B.2@5.5,20.25
  Bottom Layer w1: VD4B.2@2.037,19.937 R6B.2@5.287,19.937
NetR7B_2: R7B.2 VD5B.2 | length 4.4
  Bottom Layer w1: VD5B.2 R7B.2@20.044,4.422
NetR10B_1: R10B.1 VD6B.2 | length 4.9
  Bottom Layer w1: R10B.1@-18.225,-4.2 -18.227,-4.208 -18.286,-4.288 -19.428,-5.841 VD6B.2
NetR10B_2: R10B.2 R11B.2 R12B.2 VT5B.2 | length 61.5
  Top Layer w1: v2(14.825,-18.475) 14.825,-20.3 16.075,-21.55 20.75,-21.55 21.525,-22.325 21.7,-22.15 v2(22.85,-22.15)
  Bottom Layer w0.6: -6.024,-14.858 -6,-14.882
  Bottom Layer w1: R10B.2@-15.831,-2.538 ccw(c0,0) -6.024,-14.858 ccw(c0,0) 8.38,-13.668 11.015,-13.668 R12B.2 11.158,-16.683 12.35,-17.875 14.25,-17.875 v2@14.825,-18.45 ; R11B.2 -6,-14.882 ; v2(22.85,-22.15) 23.725,-22.15 24.65,-21.225 VT5B.2
NetR11B_1: R11B.1 VD7B.2 | length 4.2
  Bottom Layer w0.6: R11B.1 R11B.1@-5.975,-19.725
  Bottom Layer w1: R11B.1@-5.975,-19.725 VD7B.2
NetR12B_1: R12B.1 VD8B.2 | length 4.5
  Bottom Layer w1: R12B.1@13.794,-15.234 13.879,-15.098 VD8B.2
NetR16B_2: R16B.2 R17B.1 VT6B.1 | length 19
  Bottom Layer w0.6: VT6B.1@-25.007,-10.893 -23.904,-11.996 R16B.2 -23.904,-13.977 -22.7,-15.181 -22.7,-19.9 -20.1,-22.5 R17B.1
NetR19T_2: R19T.2 VT6T.1 VT7T.3 | length 7.4
  Top Layer w0.6: VT7T.3 -32.025,-19.725 -31.5,-19.2 -31.5,-14.55 VT6T.1@-30.8,-13.85
NetR20T_2: R20T.2 R29T.2 VT8T.3 | length 21.4
  Top Layer w0.6: R20T.2 26.6,-24.7 32.775,-18.525 32.775,-11.025 34.15,-9.65 R29T.2 R29T.2@34.15,-7.5
NetR21T_2: R21T.2 VT8T.1 VT11T.3 | length 14.9
  Top Layer w0.6: R21T.2 23.217,-24.7 24.138,-23.779 24.138,-23.437 25.6,-21.975 25.6,-21.25 24.3,-19.95 VT11T.3 24.3,-18.3 26.1,-18.3 26.9,-17.5 28.5,-17.5 29,-17 VT8T.1 VT8T.1@30.225,-17
NetR22T_2: R22T.2 R24T.1 VT9T.2 | length 9
  Top Layer w0.6: R24T.1 19.15,2 19.45,1.7 20.05,1.7 20.5,1.25 20.5,-0.25 21,-0.75 R22T.2 23.9,-2.65 VT9T.2
NetR23T_1: R23T.1 R32T.1 VT12T.3 | length 13.2
  Top Layer w0.5: R32T.1@31.1,8.55 31.1,-2 VT12T.3
  Top Layer w0.6: R23T.1 R32T.1@31.1,8.55
NetR23T_2: R23T.2 VT7T.1 VT10T.3 | length 141.5
  Top Layer w0.6: VT7T.1 -30.6,-21.7 -30.8,-21.9 -33.4,-21.9 ; VT10T.3 -19.975,-24.275 -21.4,-25.7 -30.2,-25.7 -33.4,-22.5 -33.4,-21.9 ; R23T.2 28.7,13.9 27.5,15.1 27.5,17.525 18.475,26.55 14.009,26.55 12.509,25.05 -28.05,25.05 -34.979,18.121 -36.379,18.121 -38.554,15.946 -38.554,-6.046 -33.4,-11.2 -33.4,-21.9
NetR24T_2: R24T.2 VD21T.3 VT12T.2 | length 24.2
  Top Layer w0.6: R24T.2@21.75,2.5 21.75,3.5 ; VD21T.3 23.025,9.925 22.7,9.6 22.7,7.6 21.75,6.65 21.75,3.5 ; VT12T.2@30.15,0.25 27,0.25 26.5,0.75 26.5,3 26,3.5 21.75,3.5
NetR25T_1: R25T.1 R30T.2 VT10T.2 | length 12.3
  Top Layer w0.6: R25T.1 -24.8,-22.8 -23.4,-24.2 VT10T.2 -21.9,-24.2 -21.2,-23.5 -21.2,-22.5 -20.5,-21.8 -18.25,-21.8 R30T.2
NetR25T_2: R25T.2 VT7T.2 | length 3.3
  Top Layer w0.6: VT7T.2 -26.35,-19.8 R25T.2
NetR26T_1: R26T.1 VT9T.1 | length 2.8
  Top Layer w0.6: R26T.1 25,1.95 VT9T.1
NetR27T_1: R27T.1 VD22T.1 VD22T.2 VT8T.2 | length 11.5
  Top Layer w0.6: R27T.1 27.9,-18.9 VT8T.2 ; VD22T.1 VD22T.2 30.5,-14 31.5,-15 31.5,-17.9 VT8T.2@30.55,-18.85
NetR27T_2: R27T.2 R33T.1 VT11T.2 | length 19.3
  Top Layer w0.6: 14.8,-16.3 15.4,-16.3 16.35,-17.25 16.35,-19.075 17.6,-20.325 21.725,-20.325 22.95,-19.1 22.95,-17.85 23.638,-17.162 23.575,-17.1 ; VT11T.2 23.35,-16.875 23.575,-17.1 ; R27T.2@27.25,-15.7 25.85,-17.1 23.575,-17.1
NetR28T_1: R28T.1 VT11T.1 | length 3.2
  Top Layer w0.6: R28T.1 25.25,-14.05 VT11T.1
NetR29T_1: R29T.1 VT9T.3 VT12T.1 | length 14.4
  Top Layer w0.6: VT9T.3 27.55,-3.3 28,-3.75 30.9,-3.75 ; R29T.1@31.05,-7.5 31.05,-3.9 30.9,-3.75 ; VT12T.1 32.875,-0.275 32.875,-2.041 31.166,-3.75 30.9,-3.75
NetR31T_2: R31T.2 VD21T.1 VD21T.2 | length 4.4
  Top Layer w0.6: VD21T.2 25.6,16.025 R31T.2
NetR34T_2: R34T.2 R35T.2 R36T.2 VD19T.1 VD20T.1 VT10T.1 | length 69.7
  Top Layer w0.6: VT10T.1 -22.525,-20.925 -22,-20.4 -16.3,-20.4 -14.5,-18.6 v1(-14.5,-16.6) ; R34T.2@-12,-15.1 R34T.2 R35T.2 -7.404,-15.1 R36T.2
  Top Layer w1: R36T.2@-7.404,-15.1 -7.404,-11.956 -7.4,-11.952 v1(-7.4,-10.95)
  Bottom Layer w0.6: v1(-14.5,-16.6) -13.1,-16.6 v1(-11.55,-15.05) ; VD19T.1@-10.817,-8.883 VD19T.1 ; VD20T.1 VD20T.1@10.867,8.533
  Bottom Layer w1: VD19T.1@-10.817,-8.883 -8.8,-10.9 -7.312,-10.9 -4.912,-8.5 -3.6,-8.5 ; -3.517,-8.54 ccw(c0,0) 5.509,7.413 ; 5.5,7.5 5.5,8.7 7.1,10.3 9.1,10.3 VD20T.1@10.867,8.533
NetR37T_2: R37T.2 VD22T.3 | length 3.6
  Top Layer w0.6: R37T.2 27.3,-7.7 VD22T.3
NetVD3B_1: VD3B.1 VD6B.1 VT2B.2 | length 36.5
  Top Layer w1: v1(-16.356,-11.51) cw(c0,0) v1(-18.085,8.54) cw(c0,0) v1(-10.645,16.931)
  Bottom Layer w1: v1(-10.645,16.931) -8.169,16.931 -7.45,17.65 VT2B.2 VT2B.2@-6.9,17.65
NetVD4B_1: VD4B.1 VD7B.1 VT3B.2 | length 56.8
  Top Layer w1: v2(-1.8,19.7) 4.8,19.7 5.9,18.6 5.9,7.1 ; v2(1.8,-19.8) 4.4,-19.8 5.7,-18.5 5.7,-7.3 ; 5.733,-7.241 ccw(c0,0) 5.903,7.103
  Bottom Layer w0.6: VT3B.2@6.925,-19.8 VT3B.2@7,-19.8
  Bottom Layer w1: VD7B.1 VT3B.2@6.85,-19.725
NetVD5B_1: VD5B.1 VD8B.1 VT4B.2 | length 34.9
  Top Layer w1: 11.073,10.874 cw(c0,0) v2(15.3,-2.6) ; 11.1,10.9 11.1,12.931 12.569,14.4 v2(14.5,14.4)
  Bottom Layer w1: v2(14.5,14.4) VD5B.1 VD5B.1@16.217,11.36 ; v2@15.432,-2.642 19.857,-5.075 ; VD8B.1@17.9,-8.5 18.018,-8.293 19.857,-5.075 ; VT4B.2@19.857,-3.368 19.857,-5.075
NetVD14T_1: VD14T.1 VD17T.2 | length 10.5
  Bottom Layer w1: VD17T.2@-10.838,8.356 cw(c0,0) VD14T.1@-1.963,13.544
NetVD15T_1: VD15T.1 VD18T.2 | length 10.7
  Bottom Layer w1: VD15T.1 ccw(c0,0) VD18T.2@10.815,-8.319
NetVD17T_1: VD17T.1 VD19T.2 | length 10.7
  Bottom Layer w1: VD19T.2@-12.651,-5.22 cw(c0,0) VD17T.1
  other v1: -13.625,-3.075
NetVD18T_1: VD18T.1 VD20T.2 | length 10.7
  Bottom Layer w1: VD18T.1@12.653,-5.224 ccw(c0,0) VD20T.2
pads on no net: SW1B.0 VD3B.0 VD4B.0 VD5B.0 VD6B.0 VD7B.0 VD8B.0 VD14T.0 VD15T.0 VD17T.0 VD18T.0 VD19T.0 VD20T.0
copper on no net: | length 62.8
  Bottom Layer w1: -16.5,-18 ccw(c-19,-18) -16.5,-18 ; -16.5,18 ccw(c-19,18) -16.5,18 ; 21.5,-18 ccw(c19,-18) 21.5,-18 ; 21.5,18 ccw(c19,18) 21.5,18

## Polygon pours and split planes (outlines as drawn)
no net on Bottom Overlay "Top Layer, Top-No Net" (none): 50.726,38.305 ccw(c50.721,38.306)
no net on Top Overlay "Top Layer, Top-No Net" (solid, pour order 5): 404 vertices, not listed, extent 6.6,12.779 16.65,24.036
GND on Top Layer "Top Layer, Top-No Net" (solid, pour order 17): -26.25,-33 -39.5,-19.75 -39.5,16.8 -23.1,33.2 23.1,33.2 39.5,16.8 39.5,-19.7 26.2,-33
GND on Bottom Layer "Top Layer, Top-No Net" (solid, pour order 19): -26.2,-33 -39.45,-19.75 -39.45,16.75 -23.05,33.2 23.1,33.2 24.85,31.5 39.55,16.8 39.55,-19.75 26.3,-33

## Keep-outs
Keep-Out Layer:
  lines w0.2: -39.5,-19.75 -26.25,-33 26.25,-33 39.5,-19.75 39.5,16.8 23.1,33.2 17.3,33.2 6.8,33.2 -23.05,33.2 -39.5,16.75 -39.5,-19.75

## Other copper
Bottom Layer:
  text "+" at 9.5,-25.9 h2
  text "-" at 20.2,-26.5 h2

## Silkscreen, mask and mechanical layers (free items; w line width, h text height)
Top Overlay:
  pour cut-out: 12.022,20.254 ccw(c11.468,20.374) 12.035,20.374 ccw(c10.833,20.374) 12.03,20.474 ccw(c11.984,20.47) 12.01,20.509 ccw(c11.988,20.476) 11.973,20.513 ccw(c12.301,19.705) 11.89,20.474 ccw(c12.19,19.913) 11.819,20.43 ccw(c11.865,20.367) 11.791,20.392 ccw(c11.842,20.374) 11.794,20.351 ccw(c12.038,20.47) 11.829,20.296 ccw(c12.246,20.643) 11.914,20.214 ccw(c11.955,20.267) 11.979,20.204 ccw(c11.954,20.269)
  pour cut-out: 12.424,20.436 ccw(c12.094,20.596) 12.447,20.497 ccw(c12.248,20.553) 12.455,20.553 ccw(c12.219,20.553) 12.448,20.607 ccw(c12.389,20.593) 12.428,20.64 ccw(c12.397,20.603) 12.395,20.651 ccw(c12.4,20.509) 12.35,20.642 ccw(c12.385,20.548) 12.309,20.613 ccw(c12.493,20.456) 12.275,20.562 12.275,20.561 ccw(c12.548,20.429) 12.252,20.496 ccw(c12.565,20.425) 12.245,20.425 ccw(c13.696,20.425) 12.248,20.329 ccw(c12.294,20.333) 12.264,20.298 ccw(c12.28,20.316) 12.293,20.295 ccw(c12.03,20.722) 12.35,20.336 ccw(c12.199,20.518) 12.39,20.379 ccw(c12.087,20.599)
  pour cut-out: 10.903,20.361 ccw(c10.852,20.455) 10.955,20.426 ccw(c10.843,20.458) 10.946,20.512 ccw(c10.737,20.401) 10.877,20.592 ccw(c8.831,17.794) 10.763,20.672 ccw(c10.743,20.641) 10.727,20.675 ccw(c10.741,20.644) 10.708,20.645 ccw(c13.736,20.511) 10.705,20.511 ccw(c11.082,20.511) 10.711,20.44 ccw(c10.888,20.474) 10.732,20.384 ccw(c10.826,20.438) 10.765,20.349 ccw(c10.805,20.408) 10.805,20.336 ccw(c10.805,20.542)
  pour cut-out: 10.548,20.579 ccw(c10.264,20.672) 10.562,20.688 ccw(c10.282,20.673) 10.537,20.791 ccw(c10.444,20.748) 10.477,20.845 ccw(c10.454,20.777) 10.414,20.837 ccw(c10.476,20.743) 10.37,20.78 ccw(c10.594,20.703) 10.358,20.682 ccw(c10.758,20.717) 10.383,20.573 ccw(c10.521,20.626) 10.404,20.536 ccw(c10.478,20.593) 10.432,20.511 ccw(c10.465,20.57) 10.464,20.503 ccw(c10.465,20.558) 10.494,20.511 ccw(c10.428,20.619)
  lines w0.254: -26,-30.5 -25.5,-30.5 ; -24.5,-32 -24.5,-31.5 ; -24.5,-29.5 -24.5,-29 ; -23.5,-30.5 -23,-30.5 ; -1.5,29 -1,29 ; 0,27.5 0,28 ; 0,30 0,30.5 ; 1,29 1.5,29 ; 22,-30.5 22.5,-30.5 ; 23.5,-32 23.5,-31.5 ; 23.5,-29.5 23.5,-29 ; 24.5,-30.5 25,-30.5
  text "1" at 9.8,30.8 h1.5
  text "2" at 11.8,30.8 h1.5
  text "3" at 14.3,30.8 h1.5
  text "ЪУЪ" at 4.7,26.5 h4
  text "ЯРЪКО!" at 4.4,23.7 h4
  text "MI-04    O / MI-05    O / MI-06    O / MI-07/08 O" at -22.7,22.7 h1.2
  text "S1" at 34.575,5.1 h1
Bottom Overlay:
  lines w0.254: -35.1,19.3 -34.6,19.3 ; -33.6,17.8 -33.6,18.3 ; -33.6,20.3 -33.6,20.8 ; -32.6,19.3 -32.1,19.3 ; -12.3,-18.2 -11.8,-18.2 ; -10.8,-19.7 -10.8,-19.2 ; -10.8,-17.2 -10.8,-16.7 ; -9.8,-18.2 -9.3,-18.2 ; 33.6,18.2 34.1,18.2 ; 35.1,16.7 35.1,17.2 ; 35.1,19.2 35.1,19.7 ; 36.1,18.2 36.6,18.2
  text "3.3V" at -11.6,29.325 h1
  text "GND" at -12.05,22.625 h1
  text "RESET" at 25.3,11.2 h1
  text "SWCLK" at 30.3,7.8 h1
  text "SWDIO" at 25.1,-12.1 h1
Bottom Paste:
  lines w1: -20.755,-19.78 cw(c-19,-18) -20.692,-16.159 ; -20.755,16.22 cw(c-19,18) -20.692,19.841 ; -19.643,-20.416 ccw(c-19,-18) -16.561,-18.551 ; -19.643,15.584 ccw(c-19,18) -16.561,17.449 ; -19.537,-15.558 cw(c-19,-18) -16.589,-17.34 ; -19.537,20.442 cw(c-19,18) -16.589,18.66 ; 17.245,-19.78 cw(c19,-18) 17.308,-16.159 ; 17.245,16.22 cw(c19,18) 17.308,19.841 ; 18.357,-20.416 ccw(c19,-18) 21.439,-18.551 ; 18.357,15.584 ccw(c19,18) 21.439,17.449 ; 18.463,-15.558 cw(c19,-18) 21.411,-17.34 ; 18.463,20.442 cw(c19,18) 21.411,18.66
Bottom Solder:
  lines w1: -21.133,-16.695 ccw(c-19,-18) -21.107,-19.345 ; -21.133,19.305 ccw(c-19,18) -21.107,16.655 ; -19.242,-15.512 cw(c-19,-18) -16.784,-16.842 ; -19.242,20.488 cw(c-19,18) -16.784,19.158 ; -19.178,-20.494 ccw(c-19,-18) -16.775,-19.139 ; -19.178,15.506 ccw(c-19,18) -16.775,16.861 ; 16.867,-16.695 ccw(c19,-18) 16.893,-19.345 ; 16.867,19.305 ccw(c19,18) 16.893,16.655 ; 18.758,-15.512 cw(c19,-18) 21.216,-16.842 ; 18.758,20.488 cw(c19,18) 21.216,19.158 ; 18.822,-20.494 ccw(c19,-18) 21.225,-19.139 ; 18.822,15.506 ccw(c19,18) 21.225,16.861
  text "Rev 4.1" at -7.8,31 h1.52
  text "+" at 9.5,-25.9 h2
  text "-" at 20.2,-26.5 h2
Mechanical 20:
  circle w0.2: c-0.008,0.003 r7.5
  circle w0.2: c18.992,18.003 r1.65
  circle w0.2: c-19.008,-17.997 r1.65
  circle w0.2: c18.992,-17.997 r1.65
  circle w0.2: c-35.996,14.006 r1.6
  circle w0.2: c-35.996,-13.994 r1.6
  circle w0.2: c36,-14 r1.65
  circle w0.2: c36,14 r1.65
  circle w0.2: c-36,14 r1.65
  circle w0.2: c-19.008,18.003 r1.65
  lines w0.2: -20.945,-9.251 cw(c-20.188,-8.813) -19.43,-8.376 -16.555,-13.355 cw(c-17.313,-13.793) -18.07,-14.23 -20.945,-9.251 ; -20.945,8.87 ccw(c-20.188,8.432) -19.43,7.995 -16.555,12.974 ccw(c-17.313,13.412) -18.07,13.849 -20.945,8.87 ; -17.952,-6.316 cw(c-17.173,-5.866) -16.394,-5.416 -12.894,-11.478 cw(c-13.673,-11.928) -14.452,-12.378 -17.952,-6.316 ; -17.952,6.322 ccw(c-17.173,5.872) -16.394,5.422 -12.894,11.484 ccw(c-13.673,11.934) -14.452,12.384 -17.952,6.322 ; -12.225,-3.013 cw(c-11.488,-2.588) -10.752,-2.163 -7.252,-8.225 cw(c-7.988,-8.65) -8.725,-9.075 -12.225,-3.013 ; -12.225,3.025 ccw(c-11.488,2.6) -10.752,2.175 -7.252,8.237 ccw(c-7.988,8.662) -8.725,9.087 -12.225,3.025 ; -3.508,-18.697 cw(c-3.508,-17.797) -3.508,-16.897 3.492,-16.897 cw(c3.492,-17.797) 3.492,-18.697 -3.508,-18.697 ; -3.508,16.903 cw(c-3.508,17.803) -3.508,18.703 3.492,18.703 cw(c3.492,17.803) 3.492,16.903 -3.508,16.903 ; -3.496,-12.094 cw(c-3.496,-11.244) -3.496,-10.394 3.504,-10.394 cw(c3.504,-11.244) 3.504,-12.094 -3.496,-12.094 ; -3.496,10.406 cw(c-3.496,11.256) -3.496,12.106 3.504,12.106 cw(c3.504,11.256) 3.504,10.406 -3.496,10.406 ; -2.975,-22.725 cw(c-2.975,-21.85) -2.975,-20.975 2.775,-20.975 cw(c2.775,-21.85) 2.775,-22.725 -2.975,-22.725 ; -2.975,21 cw(c-2.975,21.875) -2.975,22.75 2.775,22.75 cw(c2.775,21.875) 2.775,21 -2.975,21 ; 7.261,-8.225 ccw(c7.997,-8.65) 8.733,-9.075 12.233,-3.013 ccw(c11.497,-2.588) 10.761,-2.163 7.261,-8.225 ; 7.261,8.237 cw(c7.997,8.662) 8.733,9.087 12.233,3.025 cw(c11.497,2.6) 10.761,2.175 7.261,8.237 ; 12.878,-11.478 ccw(c13.658,-11.928) 14.437,-12.378 17.937,-6.316 ccw(c17.158,-5.866) 16.378,-5.416 12.878,-11.478 ; 12.878,11.484 cw(c13.658,11.934) 14.437,12.384 17.937,6.322 cw(c17.158,5.872) 16.378,5.422 12.878,11.484 ; 16.474,-13.377 ccw(c17.231,-13.815) 17.989,-14.252 20.864,-9.273 ccw(c20.106,-8.835) 19.349,-8.398 16.474,-13.377 ; 16.474,13.027 cw(c17.231,13.465) 17.989,13.902 20.864,8.923 cw(c20.106,8.485) 19.349,8.048 16.474,13.027

## Text inside footprints (layer, text, board x,y; h text height)
C5B: Bottom Overlay "+" at -26.439,20.589 h1.52 r135
C6B: Bottom Overlay "+" at -23.08,-26.386 h1.52 r225
VD3B: Bottom Overlay "-" at -19.9,6.3 h1.52 r240; Bottom Overlay "+" at -15.9,13.4 h1.52 r240
VD4B: Bottom Overlay "-" at -5.7,22.8 h1.52 r180; Bottom Overlay "+" at 4.8,22.7 h1.52 r180
VD5B: Bottom Overlay "-" at 15.5,14.2 h1.52 r120; Bottom Overlay "+" at 19.7,7.1 h1.52 r120
VD6B: Bottom Overlay "-" at -15.7,-14.3 h1.52 r300; Bottom Overlay "+" at -19.6,-7.2 h1.52 r300
VD7B: Bottom Overlay "-" at 4.8,-20.5 h1.52; Bottom Overlay "+" at -3.5,-20.4 h1.52
VD8B: Bottom Overlay "-" at 20.3,-6 h1.52 r60; Bottom Overlay "+" at 16,-13.3 h1.52 r60
VD14T: Bottom Overlay "+" at 3.675,14.075 h1.52 r180; Bottom Overlay "-" at -4.475,14.225 h1.52 r180
VD15T: Bottom Overlay "+" at -3.95,-14.05 h1.52; Bottom Overlay "-" at 4.6,-13.95 h1.52
VD17T: Bottom Overlay "+" at -10.425,10.4 h1.52 r240; Bottom Overlay "-" at -14.325,3.325 h1.52 r240
VD18T: Bottom Overlay "+" at 10.35,-10.5 h1.52 r60; Bottom Overlay "-" at 14.375,-3.275 h1.52 r60
VD19T: Bottom Overlay "+" at -14.225,-3.8 h1.52 r300; Bottom Overlay "-" at -10.075,-10.75 h1.52 r300
VD20T: Bottom Overlay "+" at 14.175,3.85 h1.52 r120; Bottom Overlay "-" at 9.95,11.025 h1.52 r120